# Altium PCB YakupTrkn.PcbDoc
Units mil, origin at the board's own origin, x right, y up, seen from the top; angles counter-clockwise.
Board outline 3510.03 x 2860.03 mil, 2 copper layers (Top Layer, Bottom Layer); 70 components, 45 nets, 260 pads, 50 vias.
Unrouted connection lines stored in the file: 2.
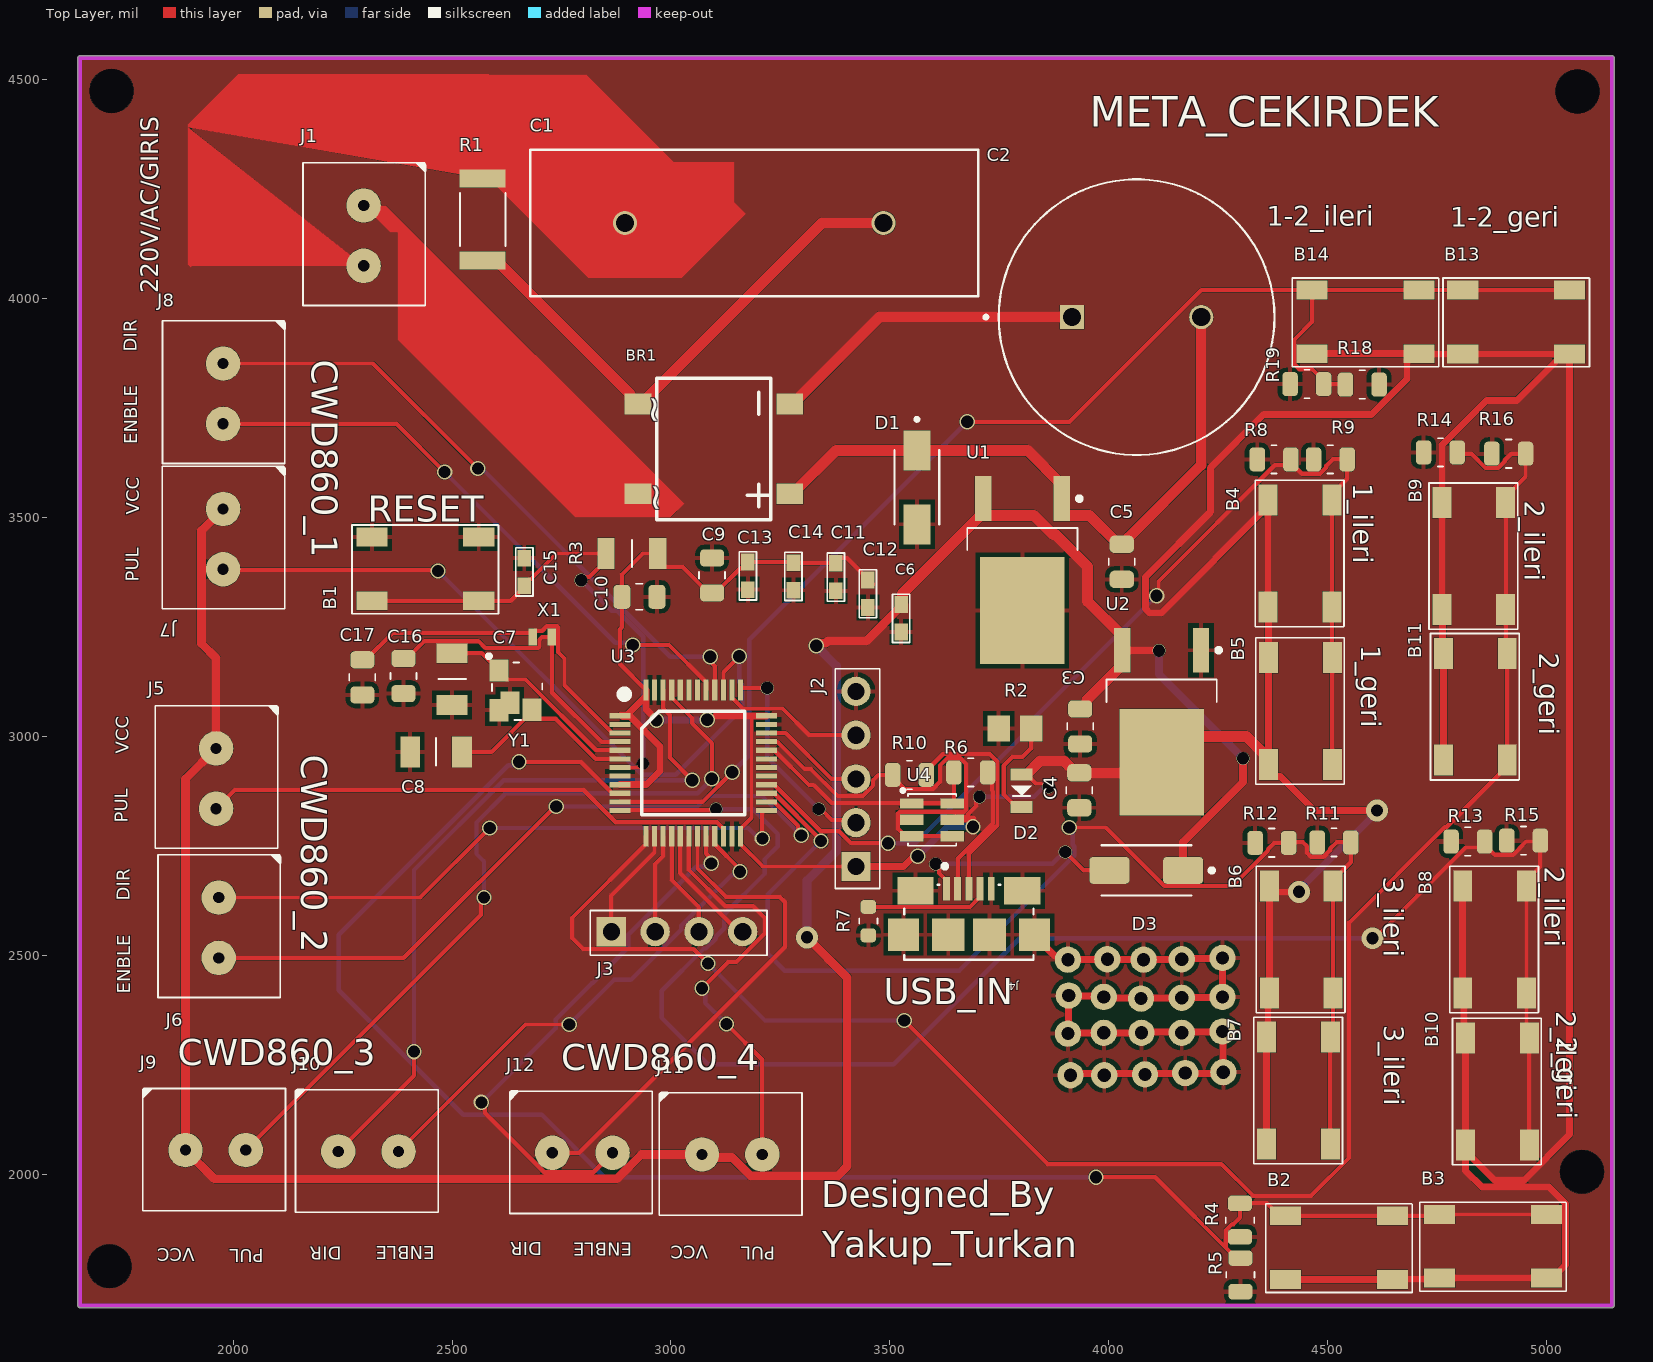
[diagram p0: Top Layer view]
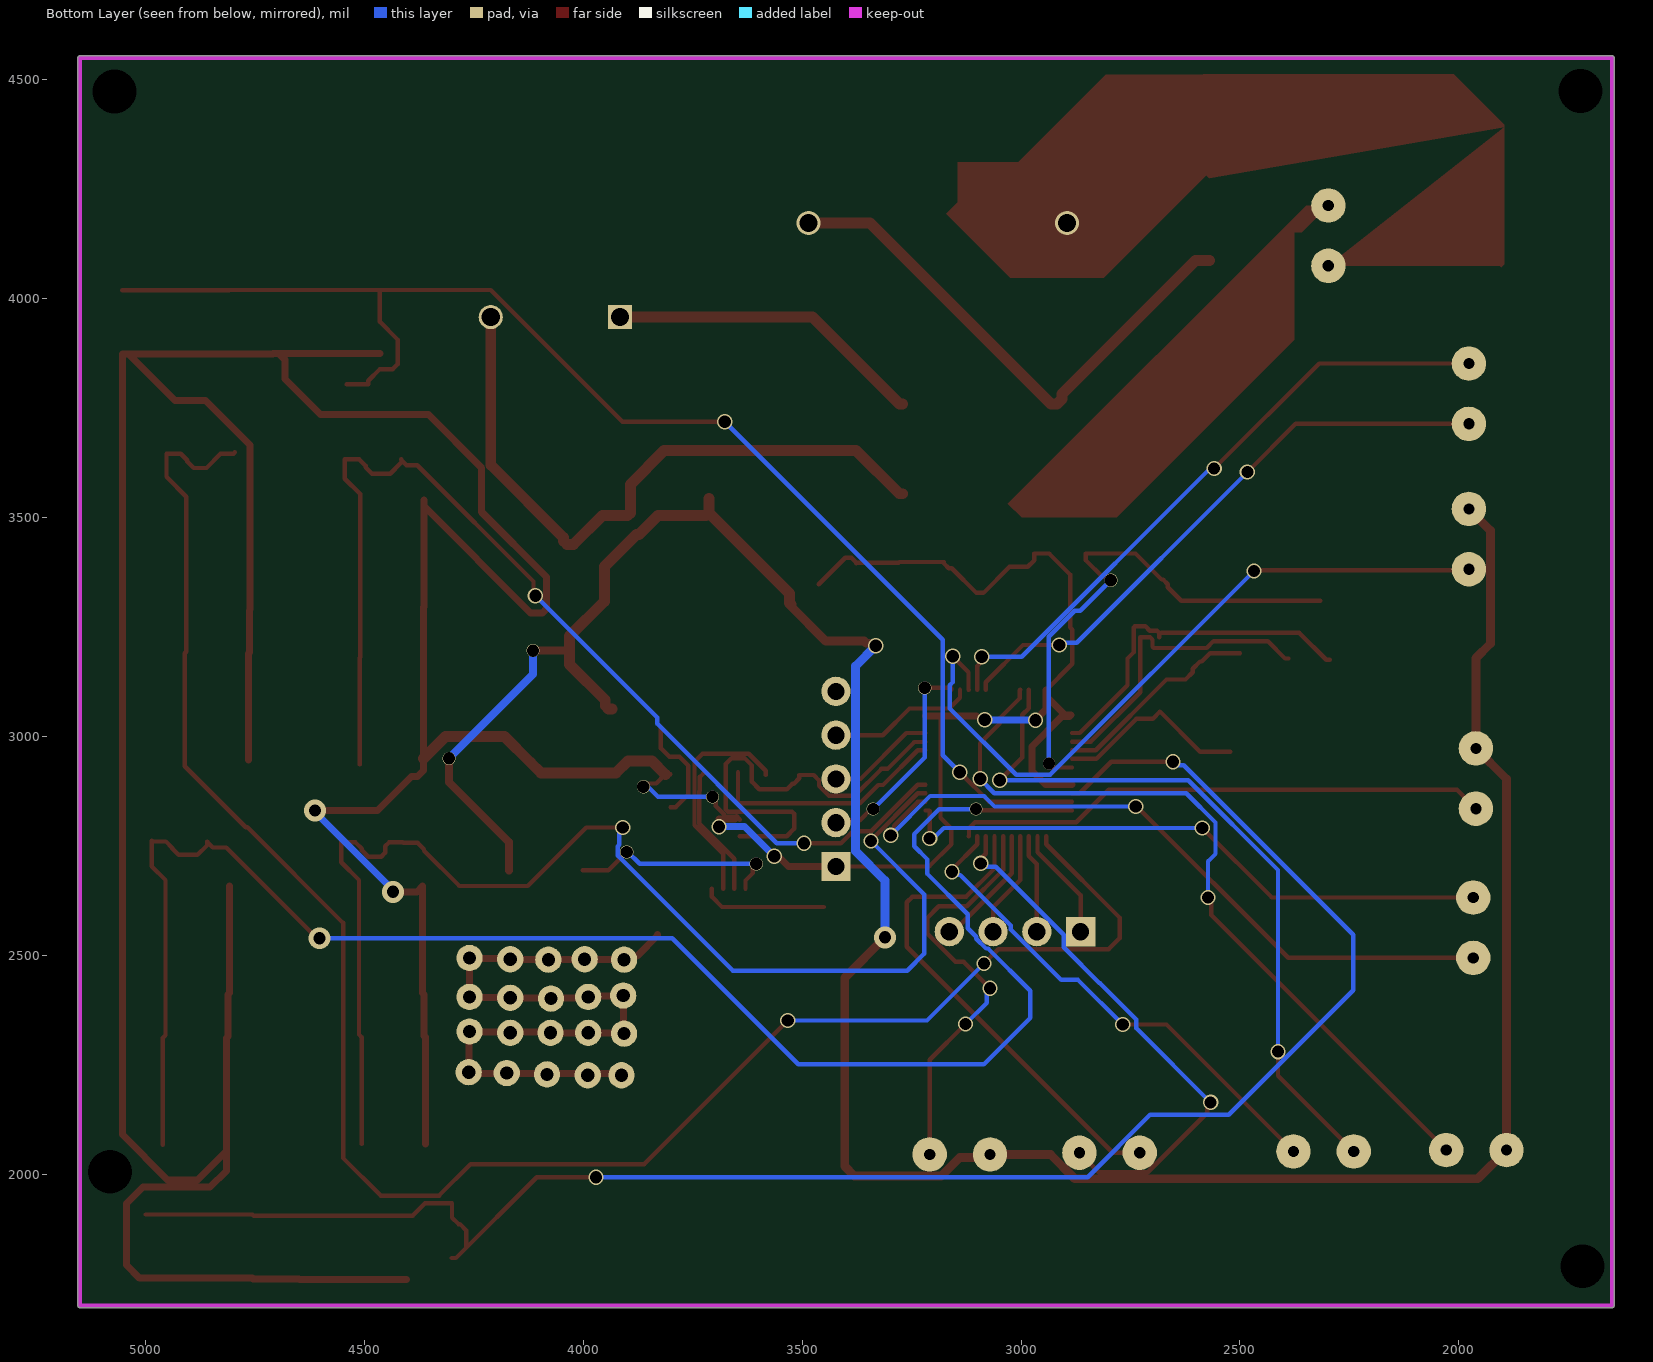
[diagram p1: Bottom Layer view, seen from below]
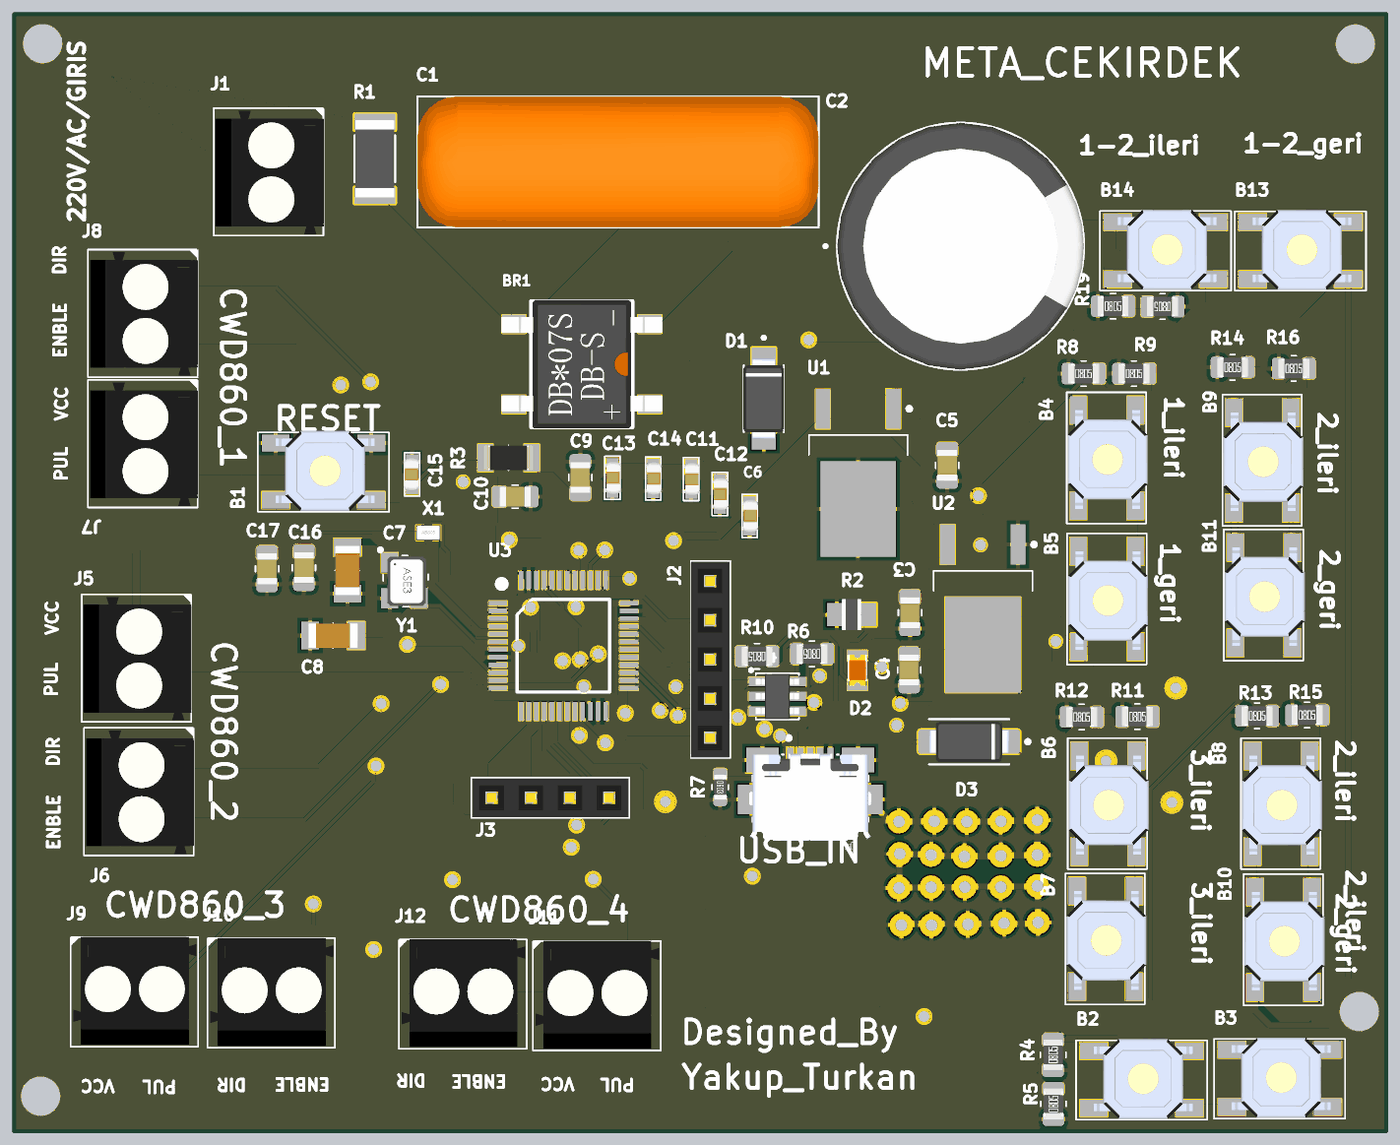
[diagram p2: 3D render of the assembled board from above, using the file's embedded part models]

## Layer stack, top to bottom
Top Solder: solder mask 0.4, Solder Resist, Dk 3.5
Top Layer: signal copper 1.4
Dielectric 1: dielectric 12.6, FR-4, Dk 4.8
Bottom Layer: signal copper 1.4
Bottom Solder: solder mask 0.4, Solder Resist, Dk 3.5

## Board outline
1650,1694.98 cw(c1650,1700) 1644.98,1700 1644.98,4550 cw(c1650,4550) 1650,4555.02 5150,4555.02 cw(c5150,4550) 5155.02,4550 5155.02,1700 cw(c5150,1700) 5150,1694.98

## Design rules (kind name [scope] priority, off if disabled: settings)
Clearance [All] p1: gap=0.1 ignorepadtopadclearanceinfootprint=FALSE except(0: Arc-Hole Track-Hole SMDPad-Hole THPad-Hole Via-Hole Fill-Hole Poly-Hole Region-Hole Text-Hole)
HoleSize [All] p1: absolutevalues=TRUE maxlimit=100 minlimit=0.1 maxpercent=80.000 minpercent=20.000
HoleToHoleClearance [All] p1: gap=0.1 allowstackedmicrovias=TRUE
MinimumSolderMaskSliver [All] p1: minsoldermaskwidth=0.1
PolygonConnect [All] p1: connectstyle=Relief reliefconductorwidth=10 reliefentries=4 polygonreliefangle="90 Angle" airgapwidth=10
RoutingVias [All] p1: holewidth=28 width=50 viastyle="Through Hole" minholewidth=28 minwidth=50 maxholewidth=28 maxwidth=50
ShortCircuit [All] p1: allowed=TRUE
SilkToSilkClearance [All] p1: silktosilkclearance=0
SilkToSolderMaskClearance [IsPad] p1: minsilkscreentomaskgap=0 clearancetoexposedcopper=TRUE
SolderMaskExpansion [All] p1: expansion=4 istentingtop=FALSE
Width [All] p1: maxlimit=30 minlimit=10 preferedwidth=16
24 further rules are at their usual default settings.

## Classes and differential pairs
component class YakupTrkn: B1 BR1 C1 C2 C3 C4 C5 C6 C7 C8 C9 C10 C11 C12 C13 C14 C15 C16 C17 D1 D2 J1 J2 J3 R1 R2 R3 U1 U2 U3 X1 Y1
component class YakupTrkn1: B2 B3 B4 B5 B6 B7 B8 B9 B10 B11 B13 B14 D3 J4 J5 J6 J7 J8 J9 J10 J11 J12 R4 R5 R6 R7 R8 R9 R10 R11 R12 R13 R14 R15 R16 R18 R19 U4

## Components (designator, comment, footprint, x,y, rotation, side; value= is the part's Value field where it differs from the comment)
B1 "Push Button" "PUSB BUTTON-SMD" 2561,3310 r180 top
B2 "Push Button" "PUSB BUTTON-SMD" 4648.09,1759.33 r180 top
B3 "Push Button" "PUSB BUTTON-SMD" 5000.09,1762.33 r180 top
B4 "Push Button" "PUSB BUTTON-SMD" 4364.33,3295.91 r90 top
B5 "Push Button" "PUSB BUTTON-SMD" 4365.33,2935.91 r90 top
B6 "Push Button" "PUSB BUTTON-SMD" 4367,2413.91 r90 top
B7 "Push Button" "PUSB BUTTON-SMD" 4361,2068.91 r90 top
B8 "Push Button" "PUSB BUTTON-SMD" 4809,2413.91 r90 top
B9 "Push Button" "PUSB BUTTON-SMD" 4761.33,3289.91 r90 top
B10 "Push Button" "PUSB BUTTON-SMD" 4815.33,2066.91 r90 top
B11 "Push Button" "PUSB BUTTON-SMD" 4765,2945.91 r90 top
B13 "Push Button" "PUSB BUTTON-SMD" 5053.09,3874 r180 top
B14 "Push Button" "PUSB BUTTON-SMD" 4709,3874.33 r180 top
BR1 "DB105STR" DB105STR 3098,3657 r270 top
C1 "ECQE4105KFW" CAPRR1500W80L2600T850H2300 3190.28,4173 r0 top
C2 "EEUTA1H471" CAPPRD750W80D1600H2000 4064,3958 r0 top
C3 "CL21B106KPQNNNE" SAMSUNG_CAP_0805_140 3935,3023 r90 top
C4 "CL21B106KPQNNNE" SAMSUNG_CAP_0805_140 3933,2877 r270 top
C5 "CL21B334KOCNNNC" SAMSUNG_CAP_0805_095 4030,3399 r90 top
C6 "C0603C104K5RACTU" CAP_0603 3526,3270 r90 top
C7 "16 pF" C1206 2519.69,3153.69 r270 top
C8 "16 pF" C1206 2486,2945 r180 top
C9 "CL21B105KBFNNNE" SAMSUNG_CAP_0805_135 3094,3368 r270 top
C10 "*" SAMSUNG_CAP_0805_095 2928,3319 r180 top
C11 "C0603C104K5RACTU" CAP_0603 3377,3364 r90 top
C12 "C0603C104K5RACTU" CAP_0603 3450,3326 r90 top
C13 "C0603C104K5RACTU" CAP_0603 3176,3367 r90 top
C14 "C0603C104K5RACTU" CAP_0603 3280,3365.5 r90 top
C15 "C0603C104K5RACTU" CAP_0603 2665,3376 r270 top
C16 "CL21C270JBANNNC" SAMSUNG_CAP_0805_075 2389,3138 r90 top
C17 "CL21C270JBANNNC" SAMSUNG_CAP_0805_075 2295,3135 r270 top
D1 "1SMA5927BT3G" DIOM5226X220N#1 3562,3569 r270 top
D2 "LH R974-LP-1" LED_RED_0805 3801,2876 r90 top
D3 "*" DIOM5226X220N#2 4086,2694 r180 top
J1 "Klemens 1x2 3.5mm" "Klemens 1x2 - 3.5mm" 2300,4150 r270 top
J2 "Header 2.54 1x5" "Header 2.54 1x5" 3423,2703 r90 top
J3 "Header 2.54 1x4" "Header 2.54 1x4" 2883.68,2582.54 r0 top
J4 "*" AMPHENOL_10118192-0001LF 3680.76,2652.32 r0 top
J5 "Klemens 1x2 3.5mm" "Klemens 1x2 - 3.5mm" 1962.97,2909.8 r270 top
J6 "Klemens 1x2 3.5mm" "Klemens 1x2 - 3.5mm" 1969,2569 r270 top
J7 "Klemens 1x2 3.5mm" "Klemens 1x2 - 3.5mm" 1978.97,3456.8 r270 top
J8 "Klemens 1x2 3.5mm" "Klemens 1x2 - 3.5mm" 1979,3789 r270 top
J9 "Klemens 1x2 3.5mm" "Klemens 1x2 - 3.5mm" 1954,2057 r0 top
J10 "Klemens 1x2 3.5mm" "Klemens 1x2 - 3.5mm" 2302.99,2053.97 r0 top
J11 "Klemens 1x2 3.5mm" "Klemens 1x2 - 3.5mm" 3134,2047 r0 top
J12 "Klemens 1x2 3.5mm" "Klemens 1x2 - 3.5mm" 2791.99,2050.97 r0 top
R1 "3502470KJT" RESC5025X120N 2570,4181 r270 top
R2 "ERJ-6RBD331V" RESC2012X70 3786,3018 r180 top
R3 "10K R1206" "R1206 Resıstor" 2908,3418 r0 top
R4 "0805S8F3001T5E" ROYALOHM_RES_0805 4300,1895 r90 top
R5 "0805S8F3001T5E" ROYALOHM_RES_0805 4301,1770 r90 top
R6 "0805W8J0220T5E" ROYALOHM_RES_0805 3685,2918 r180 top
R7 "0603SAJ0104T5E" ROYALOHM_RES_0603 3451,2578 r270 top
R8 "0805S8F3001T5E" ROYALOHM_RES_0805 4378,3633 r0 top
R9 "0805S8F3001T5E" ROYALOHM_RES_0805 4506.61,3633 r0 top
R10 "0805W8J0220T5E" ROYALOHM_RES_0805 3545,2912 r180 top
R11 "0805S8F3001T5E" ROYALOHM_RES_0805 4515,2758 r0 top
R12 "0805S8F3001T5E" ROYALOHM_RES_0805 4373,2757 r0 top
R13 "0805S8F3001T5E" ROYALOHM_RES_0805 4820.61,2760 r0 top
R14 "0805S8F3001T5E" ROYALOHM_RES_0805 4758,3649 r0 top
R15 "0805S8F3001T5E" ROYALOHM_RES_0805 4948,2762 r0 top
R16 "0805S8F3001T5E" ROYALOHM_RES_0805 4914,3646 r0 top
R18 "0805S8F3001T5E" ROYALOHM_RES_0805 4579.39,3804 r180 top
R19 "0805S8F3001T5E" ROYALOHM_RES_0805 4453,3805 r0 top
U1 "L7805-DPAK" DPAK228P972X230-3N 3803,3380 r270 top
U2 "LD108633 DPAK" DPAK228P972X230-3N 4121.24,3033.61 r270 top
U3 "STM32F103C6T6A" LQFP-48 3051,2939 r270 top
U4 "USBLC6-2SC6" SOT23-6L 3596.74,2809.6 r0 top
X1 "ABS05-32.768KHZ-T" ABS05 2706.35,3227 r0 top
Y1 "8 MHz 12.5 pf Osc" "8 MHZ Osc." 2627,3112 r270 top

## Footprints (in the part's own frame and the unit in brackets; to place one, negate y for a bottom-side part, rotate by r counter-clockwise, add the part's x,y. Pads: shape width x height; smd on the part's side, far side on the other; paste and mask are expansions set on the pad)
"8 MHZ Osc." [mm]
  rect 1.3x1.1 smd mask+0.05: 1(-0.981,-0.49) 2(1.319,-0.49) 3(1.303,1.417) 4(0.889,0.127)
  silkscreen extent -1.91,-1.19 1.88,2.01, body extent -1.38,-0.64 1.82,1.86, height 1.22
ABS05 [mm]
  rect 0.5x1 smd mask+0.05: 1(-0.55,0) 2(0.55,0)
  body extent -0.8,-0.5 0.8,0.5, height 0.5
AMPHENOL_10118192-0001LF [mm]
  rect 0.4x1.35 smd: 1(-1.3,0) 2(-0.65,0) 3(0,0) 4(0.65,0) 5(1.3,0)
  rect 2.1x1.6 smd: SH1(-3.1,-0.125) SH2(3.1,-0.125)
  rect 1.8x1.9 smd: SH3(-3.8,-2.675) SH6(3.8,-2.675)
  rect 1.9x1.9 smd: SH4(-1.2,-2.675) SH5(1.2,-2.675)
  silkscreen extent -3.75,-4.13 3.75,1.4, body extent -3.96,-5.4 3.96,0.27, height 2.5
C1206 [mm]
  rect 1.15x1.8 smd mask+0.05: 1(-0.925,-0.5) 2(2.075,-0.5)
  silkscreen extent 0.58,-1.3 0.58,0.31, body extent -1.02,-1.3 2.18,0.3, height 1
CAP_0603 [mil]
  rect 38x31 smd mask+1.97: 1(-31.5,0) 2(31.5,0)
  silkscreen extent -55,-20 55,20, body extent -41,-22 41,18, height 31
CAPPRD750W80D1600H2000 [mm]
  round 1.4 hole 1.05: N(3.75,0)
  rect 1.4x1.4 hole 1.05: P(-3.75,0)
  silkscreen extent -8.85,-8 8,8, body extent -8,-8 8,8, height 20
CAPRR1500W80L2600T850H2300 [mm]
  round 1.4 hole 1.05: 1(-7.5,0) 2(7.5,0)
  silkscreen extent -13,-4.25 13,4.25, body extent -13,-4.25 13,4.25, height 23
DB105STR [mm]
  rect 1.2x1.55 smd mask+0.05: 1(-2.605,-4.4) 2(2.605,-4.4) 3(2.605,4.4) 4(-2.605,4.4)
  silkscreen extent -4.1,-3.3 4.1,3.3, body extent -4.16,-5.2 4.16,5.2, height 2.66
DIOM5226X220N#1 [mm]
  rect 2.32x1.55 smd: A(2.14,0) C(-2.14,0)
  silkscreen extent -4.05,-1.3 2.16,1.3, body extent -2.6,-1.31 2.6,1.31, height 2.21
DIOM5226X220N#2 [mm]
  rrect25% 2.32x1.55 smd: 1(-2.14,0) 2(2.14,0)
  silkscreen extent -3.92,-1.46 2.61,1.46, body extent -2.6,-1.31 2.6,1.31, height 2.21
DPAK228P972X230-3N [mm] "D-PAK, 3-Pads, Body 6,40x6,56mm (max), IPC Medium Density"
  rect 2.6x0.95 smd mask+0.05: 1(-4.15,2.28) 2(-4.15,-2.28)
  rect 6.2x4.9 smd mask+0.05: 3(2.35,0)
  silkscreen extent -4.27,-3.2 -1.15,3.43, body extent -2.5,-3.2 4.1,3.2, height 2.3
"Header 2.54 1x4" [mm]
  rect 1.7x1.7 hole 1 mask+0.05: 1(-0.5,-0.725)
  round 1.7 hole 1 mask+0.05: 2(2.04,-0.725) 3(4.58,-0.725) 4(7.12,-0.725)
  silkscreen extent -1.73,-2.1 8.52,0.5, body extent -1.68,-2.05 8.48,0.45, height 9.1
"Header 2.54 1x5" [mm]
  rect 1.7x1.7 hole 1 mask+0.05: 1(0,0)
  round 1.7 hole 1 mask+0.05: 2(2.54,0) 3(5.08,0) 4(7.62,0) 5(10.16,0)
  silkscreen extent -1.28,-1.37 11.48,1.2, body extent -1.25,-1.3 11.45,1.2, height 9.1
"Klemens 1x2 - 3.5mm" [mm]
  round 2 hole 0.65: 1(-1.6,-0.05) 2(1.9,-0.05)
  silkscreen extent -4.11,-3.58 4.2,3.58, body extent -3.9,-3.45 4.09,3.55, height 8.9
LED_RED_0805 [mm]
  rect 0.7x1.3 smd mask+0.05: 1(-0.95,0) 2(0.95,0)
  silkscreen extent -0.3,-0.6 0.3,0.6, body extent -1.01,-0.63 1.01,0.62, height 1.1
LQFP-48 [mm] "7mm x 7mm"
  rect 0.3x1.2 smd mask+0.05: 1(-2.75,-4.25) 2(-2.25,-4.25) 3(-1.75,-4.25) 4(-1.25,-4.25) 5(-0.75,-4.25) 6(-0.25,-4.25) 7(0.25,-4.25) 8(0.75,-4.25) 9(1.25,-4.25) 10(1.75,-4.25) 11(2.25,-4.25) 12(2.75,-4.25) 25(2.75,4.25) 26(2.25,4.25) 27(1.75,4.25) 28(1.25,4.25) 29(0.75,4.25) 30(0.25,4.25) 31(-0.25,4.25) 32(-0.75,4.25) 33(-1.25,4.25) 34(-1.75,4.25) 35(-2.25,4.25) 36(-2.75,4.25)
  rect 1.2x0.3 smd mask+0.05: 13(4.25,-2.75) 14(4.25,-2.25) 15(4.25,-1.75) 16(4.25,-1.25) 17(4.25,-0.75) 18(4.25,-0.25) 19(4.25,0.25) 20(4.25,0.75) 21(4.25,1.25) 22(4.25,1.75) 23(4.25,2.25) 24(4.25,2.75) 37(-4.25,2.75) 38(-4.25,2.25) 39(-4.25,1.75) 40(-4.25,1.25) 41(-4.25,0.75) 42(-4.25,0.25) 43(-4.25,-0.25) 44(-4.25,-0.75) 45(-4.25,-1.25) 46(-4.25,-1.75) 47(-4.25,-2.25) 48(-4.25,-2.75)
  silkscreen extent -4.2,-4.2 3,3, body extent -4.45,-4.45 4.55,4.55, height 1.5
"PUSB BUTTON-SMD" [mm]
  rect 1.8x1.1 smd mask+0.05: 1(0,0) 2(6.2,0) 3(0,-3.7) 4(6.2,-3.7)
  silkscreen extent -1.15,-4.4 7.35,0.75, body extent -0.2,-4.5 6.2,0.7, height 1.5
"R1206 Resıstor" [mm]
  rect 1x1.8 smd mask+0.05: 1(-1.425,0) 2(1.575,0)
  silkscreen extent 0.08,-0.8 0.08,0.81, body extent -1.52,-0.8 1.68,0.81, height 0.55
RESC2012X70 [mm]
  rect 1.3x1.5 smd: 1(-0.95,0) 2(0.95,0)
  body extent -0.63,-1 0.63,1, height 0.5
RESC5025X120N [mm]
  rect 1.07x2.67 smd: 1(-2.38,0) 2(2.38,0)
  silkscreen extent -1.52,-1.32 1.52,1.32, body extent -2.5,-1.25 2.5,1.25, height 1.2
ROYALOHM_RES_0603 [mm]
  rrect50% 0.8x0.9 smd paste+0 mask+0.04: 1(-0.825,0) 2(0.825,0)
  silkscreen extent -0.15,-0.53 0.15,0.53, body extent -0.8,-0.4 0.8,0.4, height 0.45
ROYALOHM_RES_0805 [mm]
  rrect50% 0.9x1.397 smd paste+0 mask+0.04: 1(-0.975,0) 2(0.975,0)
  silkscreen extent -0.16,-0.83 0.16,0.83, body extent -1,-0.62 1,0.63, height 0.6
SAMSUNG_CAP_0805_075 [mm]
  rrect50% 1x1.4 smd paste+0 mask+0.04: 1(-1.016,0) 2(1.016,0)
  silkscreen extent -0.19,-0.75 0.19,0.75, body extent -1,-0.64 1,0.64, height 0.76
SAMSUNG_CAP_0805_095 [mm]
  rrect50% 1x1.4 smd paste+0 mask+0.04: 1(-1.016,0) 2(1.016,0)
  silkscreen extent -0.19,-0.75 0.19,0.75, body extent -1,-0.63 1,0.64, height 0.96
SAMSUNG_CAP_0805_135 [mm]
  rrect50% 1x1.4 smd paste+0 mask+0.04: 1(-1.016,0) 2(1.016,0)
  silkscreen extent -0.19,-0.75 0.19,0.75, body extent -1,-0.64 1,0.64, height 1.36
SAMSUNG_CAP_0805_140 [mm]
  rrect50% 1x1.4 smd paste+0 mask+0.04: 1(-1.016,0) 2(1.016,0)
  silkscreen extent -0.19,-0.75 0.19,0.75, body extent -1,-0.64 1,0.64, height 1.41
SOT23-6L [mm]
  rect 1.36x0.6 smd mask+0.05: 1(-1.175,0.95) 2(-1.175,0) 3(-1.175,-0.95) 4(1.175,-0.95) 5(1.175,0) 6(1.175,0.95)
  silkscreen extent -1.8,-1.5 1.4,1.8, body extent -1.4,-1.46 1.4,1.46, height 1.45

## Part data
B1 B2 B3 B4 B5 B6 B7 B8 B9 B10 B11 B13 B14: "Smd Push Button", Satın Alma Linki=https://urun.n11.com/diger/mini-pushbutton-switch-smd-P227461537?gclid=Cj0KCQjwkoDmBRCcARIsAG3xzl8Y_-jeD7HocNM6lvuZ_rVp83568XPGtNzlPwXWLph8oCRqo0yh87UaApZYEALw_wcB&gclsrc=aw.ds
BR1: "Bridge Diode AC-DC", Manufacturer="Sangdest Microelectronics", Max Current=1A, Operating Voltage=600V, Supplier Part Number 1=1655-1821-1-ND, Designed by=BERK, Manufacturer Part Number=DB105STR, RoHS=No, Supplier 1=Digi-Key
C1 D1 R1: Package=None, Availability=Unavailable, Price=None
  C1: MF="{'manufacturer': u'Panasonic'}", MP=ECQE4105KFW
  D1: MF="{'manufacturer': u'ON Semiconductor'}", MP=1SMA5927BT3G
  R1: MF="{'manufacturer': u'TE Connectivity'}", MP=3502470KJT
C2: "TA-A", Package=None, Availability=Unavailable, MF="{'manufacturer': u'Panasonic'}", MP=EEUTA1H471, Price=None
C3 C4: "CAP CER 10UF 10V X7R 0805", Capacitance="10 µF", Supplier Part Number 1=1276-1764-6-ND, Supplier 1=Digi-Key, Supplier 2=Farnell, Supplier 3=Mouser, Supplier Part Number 2=3013487, Supplier Part Number 3=187-CL21B106KPQNNNE
C5: "CAP CER 0.33UF 16V X7R 0805", Capacitance="330 nF", Supplier Part Number 1=1276-1797-1-ND, Supplier 1=Digi-Key, Supplier 2=Mouser, Supplier 3="Arrow Electronics", Supplier Part Number 2=187-CL21B334KOCNNNC, Supplier Part Number 3=CL21B334KOCNNNC
C6 C11 C12 C13 C14 C15: library part "CAP CER 100nF 0603", "CAP CER 100nF %10 0603 SMD", Capacitance=100nF, Case Code (Metric)=1608, Case Code (Imperial)=0603, Dielectric=X7R, Dielectric Material=Ceramic, Manufacturer=KEMET, Max Operating Temperature=125°C, Min Operating Temperature=-55°C, Package Quantity=1, Supplier Part Number 1=399-5089-1-ND, Tolerance=10%, Voltage=50V, Case/Package=0603, Category="Ceramic Capacitors", ComponentLink1Description=https://datasheet.ciiva.com/7823/kem-c1002-x7r-smd-7823591.pdf?src-supplier=Element14, ComponentLink1URL=https://datasheet.ciiva.com/7823/kem-c1002-x7r-smd-7823591.pdf?src-supplier=Element14, ComponentLink2Description=https://datasheet.ciiva.com/14602/70095383-14602583.pdf?src-supplier=Allied+Electronics, ComponentLink2URL=https://datasheet.ciiva.com/14602/70095383-14602583.pdf?src-supplier=Allied+Electronics, ComponentLink3Description=https://datasheet.ciiva.com/5999/kem-c1002-x7r-smd-5999400.pdf?src-supplier=Farnell, ComponentLink3URL=https://datasheet.ciiva.com/5999/kem-c1002-x7r-smd-5999400.pdf?src-supplier=Farnell, ComponentLink4Description=https://datasheet.ciiva.com/7823/kem-c1002-x7r-smd-7823592.pdf?src-supplier=Element14, ComponentLink4URL=https://datasheet.ciiva.com/7823/kem-c1002-x7r-smd-7823592.pdf?src-supplier=Element14, ComponentLink5Description=https://datasheet.ciiva.com/28645/1851736-28645640.pdf?src-supplier=Element14, ComponentLink5URL=https://datasheet.ciiva.com/28645/1851736-28645640.pdf?src-supplier=Element14, ComponentLink6Description=https://datasheet.ciiva.com/14585/70095383-14585209.pdf?src-supplier=Allied+Electronics, ComponentLink6URL=https://datasheet.ciiva.com/14585/70095383-14585209.pdf?src-supplier=Allied+Electronics, Contact Plating=Tin,Matte, Depth=0.8mm, Designed by=BERK, Dissipation Factor=2.5%, Height=0.8mm, Lead Pitch=0.7mm, Length=0.063inch, Manufacturer Part Number=C0603C104K5RACTU, Mount="Surface Mount", Number of Pins=2, Packaging="Tape and Reel", Pricing 1="1=0,12000, 10=0,08500, 50=0,04620, 100=0,03770, 500=0,02696, 1000=0,02118 (USD)", Radiation Hardening=No, REACH SVHC="No SVHC", RoHS=Yes, RoHS Compliant=Yes, Series="SMD Comm X7R", Stock 1=1666186, Supplier 1=Digi-Key, Termination=SMD/SMT, Thickness=0.034inch, Voltage Rating=50V, Voltage Rating (DC)=50V, Width=0.031inch
C9: "CAP CER 1UF 50V X7R 0805", Capacitance="1 µF", Supplier Part Number 1=1276-1029-1-ND, Supplier 1=Digi-Key, Supplier 2=Farnell, Supplier 3=Mouser, Supplier Part Number 2=3013482, Supplier Part Number 3=187-CL21B105KBFNNNE
C10: library part CL21A475KACLRNC, "CAP CER 4.7UF 25V X5R 0805", Capacitance="4.7 µF", Supplier Part Number 1=1276-2415-1-ND, Supplier 1=Digi-Key, Supplier 2=Mouser, Supplier 3="Arrow Electronics", Supplier Part Number 2=187-CL21A475KACLRNC, Supplier Part Number 3=CL21A475KACLRNC
C16 C17: "CAP CER 27PF 50V C0G/NP0 0805", Capacitance="27 pF", Supplier Part Number 1=1276-1285-1-ND, Supplier 1=Digi-Key
D2: library part "LED RED 0805", "LED Uni-Color Hyper Red 660nm 2-Pin Chip 0805(2012Metric) T/R", Case Code (Metric)=2012, Case Code (Imperial)=0805, Color=Red, Forward Current=30mA, Forward Voltage=1.8V, Lens Color=White, Manufacturer="Osram Opto", Max Operating Temperature=85°C, Min Operating Temperature=-30°C, Package Quantity=1, Reverse Voltage=5V, Supplier Part Number 1=475-1415-1-ND, Test Current=20mA, Case/Package=0805, Category=LEDs, ComponentLink1Description=http://www.jameco.com/Jameco/Products/ProdDS/2085634.pdf?src-supplier=Jameco, ComponentLink1URL=http://www.jameco.com/Jameco/Products/ProdDS/2085634.pdf?src-supplier=Jameco, ComponentLink2Description=http://components.arrow.com/part/dataview/0323_01825492?src-supplier=Arrow+Europe, ComponentLink2URL=http://components.arrow.com/part/dataview/0323_01825492?src-supplier=Arrow+Europe, ComponentLink3Description=https://dammedia.osram.info/media/resource/hires/osram-dam-2493888/LH%20R974.pdf?src-supplier=Digi-Key, ComponentLink3URL=https://dammedia.osram.info/media/resource/hires/osram-dam-2493888/LH%20R974.pdf?src-supplier=Digi-Key, ComponentLink4Description=http://www.mouser.com/ds/2/311/LH%20R974%20-%20CHIPLED%200805-318659.pdf?src-supplier=Mouser, ComponentLink4URL=http://www.mouser.com/ds/2/311/LH%20R974%20-%20CHIPLED%200805-318659.pdf?src-supplier=Mouser, ComponentLink5Description=https://www.verical.com/server-webapp/html/getDatasheet?partID=258950&src-supplier=Verical, ComponentLink5URL=https://www.verical.com/server-webapp/html/getDatasheet?partID=258950&src-supplier=Verical, ComponentLink6Description=http://components.arrow.com/part/dataview/41971690S1077610N9133?src-supplier=Arrow+Electronics, ComponentLink6URL=http://components.arrow.com/part/dataview/41971690S1077610N9133?src-supplier=Arrow+Electronics, ComponentLink7Description=http://components.arrow.com/part/dataview/41971690S6190115N2128?src-supplier=Arrow+Electronics, ComponentLink7URL=http://components.arrow.com/part/dataview/41971690S6190115N2128?src-supplier=Arrow+Electronics, Depth=1.35mm, Designed by=BERK, Dominant Wavelength=645nm, Length=2.1mm, Lens Size=1.25mm, Lens Style=Diffused,Flat,Colorless, Lens Transparency=Diffused, Luminous Flux=0.17lm, Luminous Intensity=71mcd, Manufacturer Part Number="LH R974-LP-1", Mount="Surface Mount", Number of Elements=1, Number of Pins=2, Packaging="Tape and Reel", Pricing 1="1=0,26000, 10=0,13900, 100=0,06480, 500=0,05978, 1000=0,04683, 2000=0,04584 (USD)", Radiation Hardening=No, RoHS=Yes, RoHS Compliant=Yes, Series=CHipLED, Stock 1=35632, Supplier 1=Digi-Key, Viewing Angle=160°, Width=1.25mm, Illumination Color=Red
D3: library part MBRA210LT3G, "...employing the Schottky Barrier principle in a metal to silicon power rectifier.", Package=None, Availability=Unavailable, MF="{'manufacturer': u'ON Semiconductor'}", MP=MBRA210LT3G, Price=None
J4: library part 10118192-0001LF, "Single Port 5 Contact Horizontal Right Angle Shielded Micro B USB 2.0 Connector", Package=None, Availability=Unavailable, MF="{'manufacturer': u'FCI'}", MP=10118192-0001LF, Price=None
R2: "Thick Film Chip Res,0805, 0.5% Precision 330ohm, 5", Package=None, Availability=Unavailable, MF="{'manufacturer': u'Panasonic'}", MP=ERJ-6RBD331V, Price=None
R4 R5 R8 R9 R11 R12 R13 R14 R15 R16 R18 R19: "RES SMD 3K OHM 1% 1/8W 0805", Resistance="3 k"
R6 R10: "RES SMD 22 OHM 5% 1/8W 0805", Resistance=22
R7: "RES SMD 100K OHM 5% 1/10W 0603", Resistance="100 k"
U1: "L7805 5V REGULATOR. SMD PAKET"
U2: "LD1086 3.3V REGULATOR"
U3: "MCU 32-bit STM32F ARM Cortex M3 RISC 32KB Flash 2.5V/3.3V 48-Pin LQFP Tray", Case/Package=LQFP, Frequency=72MHz, Manufacturer=STMicroelectronics, Max Operating Temperature=85°C, Max Power Dissipation=363mW, Max Supply Voltage=3.6V, Min Operating Temperature=-40°C, Min Supply Voltage=2V, Package Quantity=1500, Supplier Part Number 1=497-11515-ND, Address Bus Width=32b, Category=Microcontrollers, ComponentLink1Description=https://datasheet.ciiva.com/15122/getdatasheetpartid-69879-15122075.pdf?src-supplier=Verical, ComponentLink1URL=https://datasheet.ciiva.com/15122/getdatasheetpartid-69879-15122075.pdf?src-supplier=Verical, ComponentLink2Description=https://datasheet.ciiva.com/14100/pustm-arm-microcont-stm32f103-en-14100507.pdf?src-supplier=Distrelec, ComponentLink2URL=https://datasheet.ciiva.com/14100/pustm-arm-microcont-stm32f103-en-14100507.pdf?src-supplier=Distrelec, Core Architecture=ARM, Data Bus Width=32b, Designed by=BERK, Height=1.4mm, Lead Free="Lead Free", Length=7mm, Manufacturer Part Number=STM32F103C6T6A, Max Frequency=72MHz, Memory Size=32KB, Memory Type=FLASH, Number of ADC Channels=10, Number of Pins=48, Number of Programmable I/O=37, Number of SPI Channels=1, Number of Timers/Counters=3, Number of I2C Channels=1, Number of I/Os=37, Oscillator Type=Internal, Packaging=Tray, Peripherals="POR,PWM,WDT,DMA,Temp Sensor,I2C", Pricing 1="1=5,07000, 10=4,55000, 25=4,30120, 80=3,72763, 250=3,53648, 500=3,18600 (USD)", Pricing 2="250=1,99138, 260=1,95951, 510=1,91172, 1300=1,87986, 2500=1,84800, 13000=1,81613, 25000=1,78427 (USD)", Radiation Hardening=No, RAM Size=10KB, REACH SVHC="No SVHC", RoHS=Yes, RoHS Compliant=Yes, Series=STM32F103C6, SleepMode=OK, Stock 1=30, Stock 2=2360, Supplier 1=Digi-Key, Supplier 2=Avnet, Supplier Part Number 2=STM32F103C6T6A, Watchdog Timer=Yes, Weight=0.006409oz, Width=7mm, Interface=I2C,SPI,USART
U4: library part "USB PROTECTION", "TVS DIODE 5.25V 17V SOT23-6", Breakdown Voltage=6V, Capacitance=3.5pF, Case/Package=SOT-23, Clamping Voltage=17V, Leakage Current=150nA, Manufacturer=STMicroelectronics, Max Operating Temperature=125°C, Min Operating Temperature=-40°C, Operating Supply Voltage=1.1V, Package Quantity=3000, Peak Pulse Current=5A, Power Line Protection=Yes, Reverse Standoff Voltage=5.25V, Supplier Part Number 1=497-5235-1-ND, Test Current=1mA, Working Voltage=5V, Category="TVS Diodes", Clamping Voltage-Max=17V, ComponentLink1Description=https://datasheet.ciiva.com/1268/1690354-1268384.pdf?src-supplier=Element14, ComponentLink1URL=https://datasheet.ciiva.com/1268/1690354-1268384.pdf?src-supplier=Element14, ComponentLink2Description=https://datasheet.ciiva.com/4508/cd00050750-113117-4508433.pdf?src-supplier=Mouser, ComponentLink2URL=https://datasheet.ciiva.com/4508/cd00050750-113117-4508433.pdf?src-supplier=Mouser, ComponentLink3Description=https://datasheet.ciiva.com/15143/getdatasheetpartid-148465-15143789.pdf?src-supplier=Verical, ComponentLink3URL=https://datasheet.ciiva.com/15143/getdatasheetpartid-148465-15143789.pdf?src-supplier=Verical, ComponentLink4Description=https://datasheet.ciiva.com/26787/usblc6-2sc6-26787908.pdf?src-supplier=IIIC, ComponentLink4URL=https://datasheet.ciiva.com/26787/usblc6-2sc6-26787908.pdf?src-supplier=IIIC, ComponentLink5Description=https://datasheet.ciiva.com/16200/cd00050750-16200026.pdf?src-supplier=Future+Electronics, ComponentLink5URL=https://datasheet.ciiva.com/16200/cd00050750-16200026.pdf?src-supplier=Future+Electronics, ComponentLink6Description=https://datasheet.ciiva.com/41444/001184109-da-01-en-ic-esd-protecti-usblc6-2sc6-sot-23-6-stm-41444156.pdf?src-supplier=Conrad, ComponentLink6URL=https://datasheet.ciiva.com/41444/001184109-da-01-en-ic-esd-protecti-usblc6-2sc6-sot-23-6-stm-41444156.pdf?src-supplier=Conrad, Contact Plating=Tin,Matte, Data Rate=480Mbps, Depth=1.75mm, Designed by=BERK, Direction=Unidirectional,Bidirectional, Element Configuration=Dual, ESD Protection=Yes, Height=1.3mm, Lead Free="Lead Free", Length=3.05mm, Manufacturer Part Number=USBLC6-2SC6, Max Breakdown Voltage=6V, Max Reverse Leakage Current=150nA, Min Breakdown Voltage=6V, Mount="Surface Mount", Number of Bidirectional Channels=2, Number of Channels=2, Number of Elements=1, Number of Pins=6, Packaging="Tape and Reel", Polarity=Unidirectional,Bidirectional, Pricing 1="1=0,50000, 10=0,43100, 100=0,29930, 500=0,23368, 1000=0,19005 (USD)", Radiation Hardening=No, REACH SVHC="No SVHC", Reverse Breakdown Voltage=6V, RoHS=Yes, RoHS Compliant=Yes, Series=USB, Stock 1=112981, Supplier 1=Digi-Key, Termination=SMD/SMT, Width=1.75mm
X1: library part "CRYSTAL 32768kHZ_1", "Crystal, 32.768 kHz, SMD, 1.6mm x 1mm, 12.5 pF, 20 ppm, ABS05 Series", Case/Package=SMD/SMT, ESR (Equivalent Series Resistance)=90kR, Frequency=32.768kHz, Frequency Tolerance=20ppm, Load Capacitance=12.5pF, Manufacturer=Abracon, Max Operating Temperature=85°C, Min Operating Temperature=-40°C, Operating Frequency="32.768 kHz", Package Quantity=3000, Supplier Part Number 1=535-11899-1-ND, Category=Crystals, ComponentLink1Description=https://datasheet.ciiva.com/23810/abs05-23810480.pdf?src-supplier=Newark, ComponentLink1URL=https://datasheet.ciiva.com/23810/abs05-23810480.pdf?src-supplier=Newark, ComponentLink2Description=https://datasheet.ciiva.com/6728/abs05-6728949.pdf?src-supplier=Digi-Key, ComponentLink2URL=https://datasheet.ciiva.com/6728/abs05-6728949.pdf?src-supplier=Digi-Key, ComponentLink3Description=https://datasheet.ciiva.com/6728/abs05-6728950.pdf?src-supplier=Digi-Key, ComponentLink3URL=https://datasheet.ciiva.com/6728/abs05-6728950.pdf?src-supplier=Digi-Key, ComponentLink4Description=https://datasheet.ciiva.com/16411/abs05-16411149.pdf?src-supplier=Future+Electronics, ComponentLink4URL=https://datasheet.ciiva.com/16411/abs05-16411149.pdf?src-supplier=Future+Electronics, Depth=1mm, Designed by=BERK, Height=0.02inch, Lead Free="Lead Free", Length=1.6mm, Manufacturer Part Number=ABS05-32.768KHZ-T, Mount="Surface Mount", Number of Pins=2, Packaging="Tape and Reel", Pricing 1="1=1,16000, 10=1,02500, 50=0,95760, 100=0,84630, 500=0,80180, 1000=0,66816 (USD)", Radiation Hardening=No, REACH SVHC="No SVHC", RoHS=Yes, RoHS Compliant=Yes, Series=ABS05, Series Resistance=90kR, Stock 1=180522, Supplier 1=Digi-Key, Termination=SMD/SMT, Tolerance=20ppm, Width=0.039inch

## Free pads (board coordinates)
  round 60 hole 30: 2(3907,2490) 3(3997,2491) 4(4080,2490) 5(4167,2491) 6(4260,2494) 7(3909,2408) 8(3989,2405) 9(4074,2401) 10(4167,2403) 11(4260,2405) 12(3907,2321) 13(3989,2323) 14(4075,2323) 15(4167,2323) 16(4260,2326) 17(3990,2226) 18(4083,2228) 19(4175,2231) 20(4262,2233) 21(3913,2226)
  round 0 hole 100: 5(1717.27,1789.7) 5(1722.27,4474.7) 5(5071.27,4473.7) 5(5081.27,2005.7)

## Via types
v1: diameter 35, hole 28, Top Layer to Bottom Layer, 35 vias
v2: diameter 30, hole 28, Top Layer to Bottom Layer, 10 vias
v3: diameter 50, hole 28, Top Layer to Bottom Layer, 4 vias
v4: diameter 28, hole 28, Top Layer to Bottom Layer, 1 vias

## Nets (pads, with @x,y where several pads share a name; then routed paths per layer and width w, separated by ;. In a path a pad name is that pad's centre, name@x,y a point inside that pad or via, vN(x,y) a via of type N, cw(c..) or ccw(c..) an arc to the next point about the centre after c; other vN are vias at no path point)
1D: J12.1 U3.19 | length 1133.7
  Top Layer w10: J12.1 2790.43,2049 3261,2519.57 3261,2621 3248.25,2633.75 3125.68,2633.75 3060.84,2698.59 U3.19
1E: J12.2 U3.20 | length 1239.4
  Top Layer w10: v1(2567,2164) 2574.65,2156.35 2574.65,2140.46 2710.58,2004.53 2822.33,2004.53 J12.2 ; U3.20 3080.53,2732.3 3092,2720.82 v1(3092,2710)
  Bottom Layer w10: v1(2567,2164) 2736.76,2333.76 2736.76,2353.33 2819.31,2435.88 2820.02,2435.88 2902.56,2518.42 2902.56,2547.1 3057.81,2702.35 3084.35,2702.35 v1(3092,2710)
1İG: B6.3 B6.4 B7.3 B7.4 R11.2 R12.2 U3.27 | length 2860.4
  Top Layer w10: U3.27 3236.04,2870.1 3343,2763.14 v1(3343,2761) ; v1(3910,2792) 3993.33,2792 4126.94,2658.39 4283.24,2658.39 4363.96,2739.11 4363.96,2742.29 4378.67,2757 R12.2 4412.39,2758 4444.1,2758 4453.04,2749.06 4453.04,2734.34 4461.97,2725.4 4491.25,2725.4 4505.96,2740.11 4505.96,2743.29 4520.67,2758 R11.2 4553.39,2712.5 4512.67,2671.78 B6.4 B6.3 4512.67,2319 B7.4 B7.3
  Bottom Layer w10: v1(3343,2761) 3221,2639 3221,2504 3260,2465 3658.43,2465 3921.1,2727.67 3921.1,2748.88 3917.65,2752.32 3917.65,2784.35 v1(3910,2792)
1P: J11.2 U3.18 | length 962.9
  Top Layer w10: U3.18 3041.16,2694.84 3124,2612 3188,2612 3214,2586 3214,2549.46 3149.88,2485.34 3131.34,2485.34 v1(3071,2425) ; v1(3127,2343) 3208.8,2261.2 J11.2
  Bottom Layer w10: v1(3071,2425) 3078.65,2417.35 3078.65,2391.35 v1(3127,2343)
2D: J8.1 U3.40 | length 1470.4
  Top Layer w10: J8.1 2319.01,3851.99 v1(2559,3612) ; v1(3090,3182) 3090,3171.18 3100.21,3160.96 U3.40
  Bottom Layer w10: v1(2559,3612) 2568.43,3612 2998.43,3182 v1(3090,3182)
2E: J8.2 U3.41 | length 1365.7
  Top Layer w10: J8.2 2372.8,3714.2 v1(2483,3604) ; v1(2913,3209) 2995.57,3209 3080.53,3124.04 U3.41
  Bottom Layer w10: v1(2483,3604) 2873,3214 2908,3214 v1(2913,3209)
2İG: B4.3 B4.4 B5.3 B5.4 R8.2 R9.2 U3.28 | length 2503.8
  Top Layer w10: U3.28 3236.04,2889.79 3342.23,2783.6 3383.99,2783.6 3411.59,2756 v1(3496,2756) ; v1(4109.6,3321.47) 4114,3325.88 4114,3353.97 4379.39,3619.36 4403.96,3619.36 R8.2@4413.15,3628.54 ; R8.2@4416.39,3625.3 4441.29,3600.4 4482.87,3600.4 4497.58,3615.11 4497.58,3618.29 4512.28,3633 R9.2 4545,3588.78 4510,3553.78 B4.4 B4.3 4510,3181 B5.4 B5.3 ; R8.2@4416.39,3631.78 R8.2
  Bottom Layer w10: v1(3496,2756) 3558,2756 3831.41,3029.41 3831.41,3043.28 v1(4109.6,3321.47)
2P: J7.2 U3.39 | length 1657
  Top Layer w10: J7.2 1979,3380 2466,3380 v1(2468,3378) ; U3.39 3120,3106.43 3120,3146.6 v1(3156.4,3183)
  Bottom Layer w10: v1(2468,3378) 2933.75,2912.25 3011.25,2912.25 3163,3064 3163,3116.82 3156.4,3123.42 v1(3156.4,3183)
3.3V: B2.1 B2.2 B3.1 B3.2 B4.1 B4.2 B5.1 B5.2 B6.1 B6.2 B7.1 B7.2 B8.1 B8.2 B9.1 B9.2 B10.1 B10.2 B11.1 B11.2 B13.1 B13.2 B14.1 B14.2 C4.1 C9.2 C10.2 C11.2 C12.2 C13.2 C14.2 D2.2 J2.1 R3.2 U2.3 U3.1 U3.9 U3.24 U3.36 U3.48 U4.5 | length 12237.5
  Top Layer w10: U3.48 2882.9,3166.16 2882.9,3244.12 2888,3249.22 C10.2 2888,3370 2936,3418 R3.2 2970.01,3402.25 2984.69,3387.57 3026.56,3387.57 3086.13,3328 C9.2 3101.87,3328 3158.37,3384.5 3165.5,3384.5 3176,3395 C13.2 3278.5,3398.5 C14.2 3375.5,3397 C11.2 3377,3397.86 3387.5,3408.36 3401.64,3408.36 C12.2@3462,3348 ; 3189.86,3047.27 3184,3041.41 3184,2814.13 3159.27,2789.39 U3.24 3159.27,2753.96 3210.23,2703 J2.1 ; U4.5 3649.81,2816.41 3672.49,2816.41 ; 3679.04,2822.96 3697.32,2841.24 3697.32,2854.35 v2(3704.97,2862) ; D2.2 3812.81,2913.4 3833.56,2892.65 3855.35,2892.65 v2(3863,2885)
  Top Layer w16: U3.9 2943.79,2889.79 2975,2921 2975,2977.24 2907.07,3045.17 2889.96,3045.17 2885.77,3049.36 2899.3,3049.36 U3.48@2942.73,3092.8 ; U3.48 U3.48@2942.73,3092.8 ; v1(2967,3037) 2967,3037.81 2942.73,3062.08 U3.48@2942.73,3092.8 ; 3101.47,3047.27 3189.86,3047.27 U3.36 ; J2.1 3531.37,2703 3554.9,2726.52 v1(3564.1,2726.52) ; U4.5@3649.81,2815.2 3653.5,2811.51 3690,2811.51 v1(3690,2794) ; B7.1 B7.2 4364,2316 4364,2410.91 B6.1 B6.2 4380,2645 v3(4435,2645) ; B4.2 B4.2@4364.33,3526.22 ; B2.2 B2.1 4649.59,1760.83 4754.5,1760.83 B3.2 B3.1 5013.87,1762.33 5043.63,1792.08 5043.63,1933.01 5006.4,1970.24 4852.56,1970.24 4815.33,2007.47 B10.1@4815.33,2053.13 ; B14.2 B14.1@4695.22,3874.33 ; v3(4613,2831) 4470.24,2831 4392.76,2908.47 4378.98,2908.47 4365.33,2922.13 B5.1 4365.33,2949.68 B5.2 4364.83,3180.5 4364.83,3295.41 B4.1 B4.2@4364.33,3526.22 ; B11.1 B11.2 4763.17,3191.83 4763.17,3288.07 B9.1 B9.2 4761.33,3665.43 4863.41,3767.51 4932.82,3767.51 B13.1@5039.31,3874 ; B8.2 B8.1 4812.17,2410.74 4812.17,2314.17 B10.2 B10.1 B10.1@4815.33,2053.13 ; B4.2@4364.33,3526.22 4120.41,3282.3 4093.37,3282.3 4084,3291.67 4084,3364 4232.24,3512.24 4232.24,3613.24 4354.16,3735.16 4600.41,3735.16 4681.57,3816.31 4681.57,3860.68 B14.1@4695.22,3874.33 ; B14.1@4695.22,3874.33 B14.1 4709.17,3874.17 4808.83,3874.17 B13.2 B13.1@5039.31,3874 ; B10.1@4815.33,2053.13 4881.46,1987 4949.64,1987 5053.09,2090.46 B13.1 B13.1@5039.31,3874
  Top Layer w25: D2.2@3812.81,2913.4 3843.41,2944 3898.13,2944 3925.13,2917 C4.1 4097.14,2917 U2.3 4180.14,3000 4315.02,3000 B5.1@4365.33,2949.68
  Bottom Layer w10: v2(3704.97,2862) 3829.43,2862 3852.43,2885 v2(3863,2885)
  Bottom Layer w16: v1(2967,3037) 2967.5,3037.5 3082.5,3037.5 v1(3083,3038) ; v1(3564.1,2726.52) 3631.57,2794 v1(3690,2794) ; v3(4435,2645) 4435,2649 4613,2827 v3(4613,2831)
3D: J10.1 U3.46 | length 1669.3
  Top Layer w10: J10.1 2413,2225 v1(2413,2280) ; U3.46 2982.1,3064.47 2997.1,3049.47 2997.1,2952 v1(3048.9,2900.2)
  Bottom Layer w10: v1(2413,2280) 2413,2695 2618.2,2900.2 v1(3048.9,2900.2)
3E: J10.2 U3.21 | length 1154.8
  Top Layer w10: J10.2 2667.8,2342 v1(2768,2342) ; U3.21 3100.21,2753.96 3158,2696.17 v1(3158,2691)
  Bottom Layer w10: v1(2768,2342) 2869.84,2443.84 2908.38,2443.84 3023.59,2559.05 3023.59,2568.13 3138.81,2683.35 3150.35,2683.35 v1(3158,2691)
3İG: B9.3 B9.4 B11.3 B11.4 R14.2 R16.2 U3.13 | length 4323.1
  Top Layer w10: U3.13 2942.73,2753.96 2775,2586.23 2775,2539 2800.03,2513.97 3052.03,2513.97 v1(3084.72,2481.28) ; v1(3533,2351) 3860.9,2023.1 4257.53,2023.1 4329.63,1951 4463,1951 4549,2037 4549,2574.01 4767.59,2792.6 4771.14,2792.6 4910.67,2932.13 B11.3 B11.4 4907,3193.67 B9.3 B9.4 4907,3547.78 4952.39,3593.17 R16.2 4919.67,3646 4904.96,3631.29 4904.96,3628.11 4890.25,3613.4 4860.97,3613.4 4845.04,3629.34 4845.04,3630.06 4829.1,3646 4799.39,3646 R14.2
  Bottom Layer w10: v1(3084.72,2481.28) 3215,2351 v1(3533,2351)
3P: J9.2 U3.45 | length 1801.8
  Top Layer w10: J9.2 2565.77,2592 2565.77,2624.77 v1(2573,2632) ; U3.45 3002.69,3105.42 3002.69,3087.7 3048.35,3042.05 3048.35,3030.09 3094,2984.43 3094,2903.96 v1(3093.52,2903.48)
  Bottom Layer w10: v1(2573,2632) 2573,2714.6 2555.9,2731.7 2555.9,2803.47 2622.53,2870.1 3061.1,2870.1 3093.52,2902.52 v1(3093.52,2903.48)
4D: J6.1 U3.25 | length 1390.3
  Top Layer w10: J6.1 2426.99,2631.99 v1(2586,2791) ; v1(3209,2767) 3209,2829.83 3209.91,2830.73 U3.25
  Bottom Layer w10: v1(2586,2791) 3176.43,2791 3200.43,2767 v1(3209,2767)
4E: J6.2 U3.26 | length 1641.3
  Top Layer w10: J6.2 2389.76,2494.2 2735.57,2840 v1(2737.78,2840) ; U3.26 3236.04,2850.42 3290.35,2796.11 3290.35,2781.65 v1(3298,2774)
  Bottom Layer w10: v1(2737.78,2840) 3060.46,2840 3084.56,2864.1 3207.9,2864.1 v1(3298,2774)
4İG: B8.3 B8.4 B10.3 B10.4 R13.2 R15.2 U3.12 | length 3921.9
  Top Layer w10: U3.12 2884.58,2831.64 3100.64,2831.64 v2(3103,2834) ; v3(4603,2539) 4608.47,2539 4815.83,2746.36 4846.58,2746.36 R13.2@4859,2758.78 ; R13.2 R13.2@4859,2758.78 ; B10.3 B10.4 4954.67,2317.33 B8.3 B8.4 4954.67,2671.78 4986.39,2703.5 R15.2 4984.39,2760 4953.67,2760 4938.96,2745.29 4938.96,2744.11 4924.25,2729.4 4881.9,2729.4 4859,2752.3 R13.2@4859,2758.78
  Bottom Layer w10: v2(3103,2834) 3187,2834 3244,2777 3244,2749 3214,2719 3214,2686 3121.81,2593.81 3121.81,2561.81 3102.56,2542.56 3102.56,2538.03 3079.97,2515.44 3075.44,2515.44 2979,2419 2979,2366 2978.64,2365.64 2978.64,2357.36 3085,2251 3509,2251 3797,2539 v3(4603,2539)
4P: J5.2 U3.22 | length 1231.2
  Top Layer w10: J5.2 2004.1,2878.1 2799.57,2878.1 2873.77,2803.9 3105.39,2803.9 3118.99,2790.3 3118.99,2772.58 U3.22
5İG: B13.3 B13.4 B14.3 B14.4 R18.2 R19.2 U3.11 | length 3135.3
  Top Layer w10: U3.11 3072.42,2850.42 v1(3140,2918) ; v1(3677,3719) 3910.65,3719 4211.65,4020 B14.4 ; R18.2 4540.5,3804.5 4491.89,3804.5 R19.2 4491.39,3812.7 4464.82,3839.26 4435.68,3839.26 4424.37,3850.56 4424.37,3906.69 4464.91,3947.22 B14.4 ; B13.3 B13.4 4808.67,4020 B14.3 B14.4
  Bottom Layer w10: v1(3140,2918) 3179,2957 3179,3221 v1(3677,3719)
5V: C3.2 C6.2 D3.1 J5.1 J7.1 J9.1 J11.1 U1.2 U2.2 | length 6363.5
  Top Layer w18: U2.2 4032.47,3196 v2(4115,3196) ; D3.1 4170.25,2758.74 4307,2895.49 v2(4307,2950)
  Top Layer w20: J7.1 1927.53,3470.33 1927.53,3212.33 1961,3178.86 J5.1 1891.01,2902.8 J9.1 1956.61,1989.43 2877.19,1989.43 2932.79,2045.03 J11.1 3078.02,2038.02 3140.38,2038.02 3182.83,1995.56 3380.56,1995.56 3403,2018 3403,2449 v3(3311,2541) ; v1(3332,3207) 3337.74,3212.74 3353.57,3212.74 3358.72,3217.89 3445.89,3217.89 3526,3298 C6.2
  Top Layer w25: C6.2 3529,3304.5 3529,3326.67 U1.2@3713.24,3510.91 ; U1.2 U1.2@3713.24,3510.91 ; C3.2 3942.87,3063 3950.06,3070.19 3950.06,3083.11 4031.47,3164.52 U2.2 4031.47,3229.48 3952.15,3308.8 3952.15,3388.65 3879.03,3461.78 3872.67,3461.78 3829.74,3504.7 3719.44,3504.7 U1.2@3713.24,3510.91
  Bottom Layer w18: v2(4115,3196) 4115,3142 v2(4307,2950)
  Bottom Layer w20: v3(3311,2541) 3311,2670.71 3378.1,2737.81 3378.1,3160.9 v1(3332,3207)
6İG: B2.3 B2.4 B3.3 B3.4 R4.2 R5.2 U3.10 | length 4103.9
  Top Layer w10: v1(2653,2942) 2794.06,2942 2865.96,2870.1 U3.10 ; v1(3971,1993) 4106.6,1993 4291.22,1808.39 R5.2 ; 4267.4,1834.29 4267.4,1871.25 4282.11,1885.96 4285.29,1885.96 4300,1900.67 R4.2 4361.83,1933.39 4390.22,1905 B2.4 B2.3 4753,1905 B3.4 B3.3
  Bottom Layer w10: v1(2653,2942) 2645.35,2934.35 2628.35,2934.35 2241,2547 2241,2420.04 2525.44,2135.6 2705.29,2135.6 2847.89,1993 v1(3971,1993)
12V: BR1.3 C2.N C5.2 D1.C U1.1 | length 1525.3
  Top Layer w25: BR1.3 3278.12,3554.44 3376.93,3653.25 D1.C 3815.38,3653.25 3892.76,3575.87 U1.1 3892.76,3510.91 3898.96,3504.7 3956.42,3504.7 4022.13,3439 C5.2 4037.87,3439 4045.06,3446.19 4045.06,3454.06 4211.64,3620.64 C2.N
GND: B1.3 B1.4 C3.1 C4.2 C5.1 C6.1 C7.2 C8.2 C9.1 C10.1 C11.1 C12.1 C13.1 C14.1 C15.1 C16.1 C17.2 D1.A J2.5 J4.5 J4.SH1 J4.SH2 J4.SH3 J4.SH4 J4.SH5 J4.SH6 pad.2 pad.3 pad.4 pad.5@4167,2491 pad.6 pad.7 pad.8 pad.9 pad.10 pad.11 pad.12 pad.13 pad.14 pad.15 pad.16 pad.17 pad.18 pad.19 pad.20 pad.21 R2.2 R4.1 R5.1 R7.2 R8.1 R9.1 R11.1 R12.1 R13.1 R14.1 R15.1 R16.1 R18.1 R19.1 U1.3 U2.1 U3.8 U3.23 U3.35 U3.47 U4.2 Y1.2 Y1.4 | length 1788.7
  Top Layer w16: J4.SH6 3830.36,2545.03 3876.97,2498.42 3898.58,2498.42 pad.2 3907.5,2490.5 3996.5,2490.5 pad.3 3997.5,2490.5 4079.5,2490.5 pad.4 4080.5,2490.5 4166.5,2490.5 4167,2491 4168.5,2492.5 4258.5,2492.5 pad.6 pad.11 4259,2404 4168,2404 pad.10 4166,2402 4075,2402 pad.9 4072,2403 3991,2403 pad.8 3987.5,2406.5 3910.5,2406.5 pad.7 3908,2407 pad.12@3908,2322 ; pad.12 pad.12@3908,2322 ; pad.21 3916.5,2229.5 4258.5,2229.5 pad.20 4261,2234 4261,2325 pad.16 4258.5,2324.5 4076.5,2324.5 pad.14 pad.13 3988,2322 pad.12@3908,2322
NetBR1_1: BR1.1 C1.2 R1.2 | length 1229.2
  Top Layer w25: R1.2 2601.5,4087.3 2906.76,3782.04 2906.76,3770.68 2917.88,3759.56 BR1.1 2931.66,3759.56 3345.1,4173 C1.2
NetBR1_2: BR1.2 J1.1
NetBR1_4: BR1.4 C2.P | length 727.3
  Top Layer w25: BR1.4 3278.12,3759.56 3476.56,3958 C2.P
NetC1_1: C1.1 J1.2 R1.1
NetC7_1: C7.1 U3.5 Y1.1 | length 480.1
  Top Layer w10: C7.1 2568.24,3190.11 2587.13,3171.22 2591.07,3171.22 2607.72,3154.57 Y1.1 2607.72,3146.69 2624.37,3130.04 2667.91,3130.04 2829.42,2968.53 U3.5
NetC8_1: C8.1 U3.6 Y1.3 | length 444.1
  Top Layer w10: C8.1 2590.73,2964.69 2682.8,3056.75 2699.46,3040.1 2736.63,3040.1 2827.88,2948.84 U3.6
NetC16_2: C16.2 U3.4 X1.2 | length 710
  Top Layer w10: C16.2 2396.87,3178 2436.72,3217.85 2560.18,3217.85 2575.81,3202.21 2696.65,3202.21 2699.64,3205.2 2699.64,3221.14 2705.49,3227 X1.2 2728,3101 2840.79,2988.21 U3.4
NetC17_1: C17.1 U3.3 X1.1 | length 807.6
  Top Layer w10: C17.1 2302.87,3175 2364.87,3237 2679.85,3237 2684.69,3232.16 X1.1 2684.69,3236.84 2689.54,3241.69 2705.95,3241.69 2716.05,3251.79 2739.95,3251.79 2742.94,3248.8 2742.94,3192.06 2757,3178 2757,3116.86 2865.96,3007.9 U3.3
NetD2_1: D2.1 R2.1 | length 242.6
  Top Layer w10: D2.1 3789.19,2838.6 3760.41,2867.38 3760.41,2933.39 3780.45,2953.43 3803.36,2953.43 3823.4,2973.47 R2.1
NetD3_2: D3.2 J4.1 | length 492.2
  Top Layer w10: v2(3605,2709) 3612.65,2701.35 3612.65,2687.94 3629.57,2671.02 J4.1 ; v2(3901,2736) 3943,2694 D3.2
  Bottom Layer w10: v2(3605,2709) 3871.43,2709 3898.43,2736 v2(3901,2736)
NetJ3_1: J3.1 U3.14 | length 258.4
  Top Layer w10: J3.1 2864,2637 2962.42,2735.42 U3.14
NetJ3_2: J3.2 U3.15 | length 225.3
  Top Layer w10: J3.2 2964,2708.72 2982.42,2727.13 U3.15@2982.42,2771.68
NetJ3_3: J3.3 U3.16 | length 243.4
  Top Layer w10: U3.16 3001.79,2740.62 3002,2740.41 3002,2672 3064,2610 J3.3
NetJ3_4: J3.4 U3.17 | length 282
  Top Layer w10: U3.17 3021.47,2687.53 3155,2554 J3.4
NetJ4_2: J4.2 R6.1 | length 303.6
  Top Layer w10: J4.2 3655.17,2720.6 3735.07,2800.5 3735.07,2874.47 3733.72,2875.82 3733.72,2907.67 R6.1
NetJ4_3: J4.3 R10.1 | length 513.5
  Top Layer w10: R10.1 3583.39,2921.78 3622.3,2960.7 3727.93,2960.7 3746.2,2942.42 3746.2,2797.35 3680.76,2731.9 J4.3
NetJ4_4: J4.4 R7.1 | length 283.6
  Top Layer w10: R7.1 3683.21,2610.48 3706.35,2633.61 J4.4
RESET: B1.1 B1.2 C15.2 R3.1 U3.7 | length 1218.5
  Top Layer w10: B1.2 B1.1 2634,3310 2665,3341 C15.2 2665,3348 2675.5,3358.5 2679,3358.5 2738.5,3418 R3.1 2851.9,3402.25 2814.3,3364.65 2802.65,3364.65 v2(2795,3357) ; U3.7 2930.28,2929.16 2936.14,2935.02 v4(2936.14,2938.34)
  Bottom Layer w10: v2(2795,3357) 2864.68,3287.32 2877.25,3287.32 2936.9,3227.67 2936.9,2939.1 v4(2936.14,2938.34)
SWCLK: J2.3 U3.34 | length 248.1
  Top Layer w10: U3.34 3262.1,3007.9 3367,2903 J2.3
SWDIO: J2.2 U3.37 | length 488.6
  Top Layer w10: U3.37 3159.27,3110.09 3160.17,3111 v2(3220,3111) ; v2(3338,2834) 3343.15,2834 3368.86,2808.29 3417.71,2808.29 J2.2
  Bottom Layer w10: v2(3220,3111) 3220,2952 v2(3338,2834)
TDI: J2.4 U3.38 | length 336.6
  Top Layer w10: U3.38 3139.58,3088.61 3164.19,3064 3255,3064 3316,3003 J2.4
USB_N: R6.2 U3.32 U4.1 U4.6 | length 547.5
  Top Layer w10: U3.32 3236.04,2968.53 3315.57,2889 3326.37,2889 3368.37,2847 U4.1 U4.6 3646.61,2850.61 R6.2
USB_P: R10.2 U3.33 U4.3 U4.4 | length 1039.8
  Top Layer w10: U3.33 3219.23,2987.31 3243.69,2987.31 3305.13,2925.87 3319.13,2925.87 3380.56,2864.44 3438.97,2864.44 3461.56,2887.03 3461.56,2899.67 3473.9,2912 R10.2 3506.61,2904.3 3519.04,2891.88 3522.51,2891.88 3534.99,2879.4 3598.03,2879.4 3615,2896.37 3615,2933.63 3631.97,2950.6 3661.25,2950.6 3674.87,2936.98 3674.87,2833.08 3670.09,2828.3 3523.39,2828.3 3518.61,2823.52 3518.61,2789.11 3535.52,2772.2 U4.3 U4.4
pads on no net: U3.2 U3.29 U3.30 U3.31 U3.42 U3.43 U3.44

## Polygon pours and split planes (outlines as drawn)
GND on Top Layer "GND_L01_P000" (solid, pour order 0): 1650,4550 5150,4550 5150,1700 1650,1700

## Keep-outs
Keep-Out Layer:
  lines w10: 1650,1700 1650,4550 5150,4550 5150,1700 1650,1700

## Other copper
Top Layer:
  region net NetC1_1: 2577,4281.7 2810.7,4048 3025,4048 3171,4194 3145,4220 3145,4312 3007,4312 2807,4512 2537,4512
  region net NetC1_1: 1896,4392 1896,4397 2012,4513 2584,4513 2584,4288.7 2570,4274.7
  region net NetC1_1: 2298.03,4075.2 1906.2,4075.2 1903,4072 1896,4079 1896,4392
  region net NetBR1_2: 2299,4225 2298.03,4224.03 2298.03,4212.99 2349.01,4212.99 3030,3532 2999,3501 2781,3501 2376,3906 2376,4152 2359.02,4152 2298.03,4212.99

## Silkscreen, mask and mechanical layers (free items; w line width, h text height)
Top Overlay:
  text "META_CEKIRDEK" at 3957,4392.66 h70
  text "1-2_ileri" at 4361,4167 h45
  text "1-2_geri" at 4781,4164 h45
  text "220V/AC/GIRIS" at 1829,4013 h40 r90
  text "DIR" at 1780,3879 h30 r90
  text "CWD860_1" at 2179,3861 h60 r270
  text "ENBLE" at 1781,3667 h30 r90
  text "1_ileri" at 4559,3579 h45 r270
  text "2_ileri" at 4951,3539 h45 r270
  text "VCC" at 1785,3507 h30 r90
  text "RESET" at 2307,3490 h60
  text "PUL" at 1784,3353 h30 r90
  text "1_geri" at 4577,3208 h45 r270
  text "2_geri" at 4984,3191 h45 r270
  text "VCC" at 1761,2961 h30 r90
  text "CWD860_2" at 2156,2958 h60 r270
  text "PUL" at 1759,2803 h30 r90
  text "2_ileri" at 4996.2,2702.87 h45 r270
  text "3_ileri" at 4628,2679 h45 r270
  text "DIR" at 1764,2625 h30 r90
  text "ENBLE" at 1765,2412 h30 r90
  text "USB_IN" at 3486,2388 h60
  text "2_ileri" at 5022.2,2371.87 h45 r270
  text "3_ileri" at 4630,2340 h45 r270
  text "2_geri" at 5025,2314 h45 r270
  text "CWD860_3" at 1873,2249 h60
  text "CWD860_4" at 2750,2237 h60
  text "Designed_By" at 3344,1924.99 h60
  text "DIR" at 2706,1845 h30 r180
  text "ENBLE" at 2912,1843 h30 r180
  text "VCC" at 3085,1836 h30 r180
  text "ENBLE" at 2461,1835 h30 r180
  text "DIR" at 2248,1834 h30 r180
  text "PUL" at 3238,1834 h30 r180
  text "VCC" at 1912,1831 h30 r180
  text "PUL" at 2070,1829 h30 r180
  text "Yakup_Turkan" at 3346,1809.99 h60

## Text inside footprints (layer, text, board x,y; h text height)
BR1: Top Overlay "~" at 2939.91,3580.07 h60 r270; Top Overlay "~" at 2935.97,3780.86 h60 r270
J4: Mechanical 13 "PCB Edge" at 3885.68,2498.63 h60